# Altium PCB CAPSTONE_5.0.PcbDoc
Units mil, origin at the board's own origin, x right, y up, seen from the top; angles counter-clockwise.
Board outline 2900 x 2365 mil, 4 copper layers (Top Layer, GND, GND (Plane2), Bottom Layer), stack 27.756 mil thick; 47 components, 31 nets, 138 pads, 41 vias.
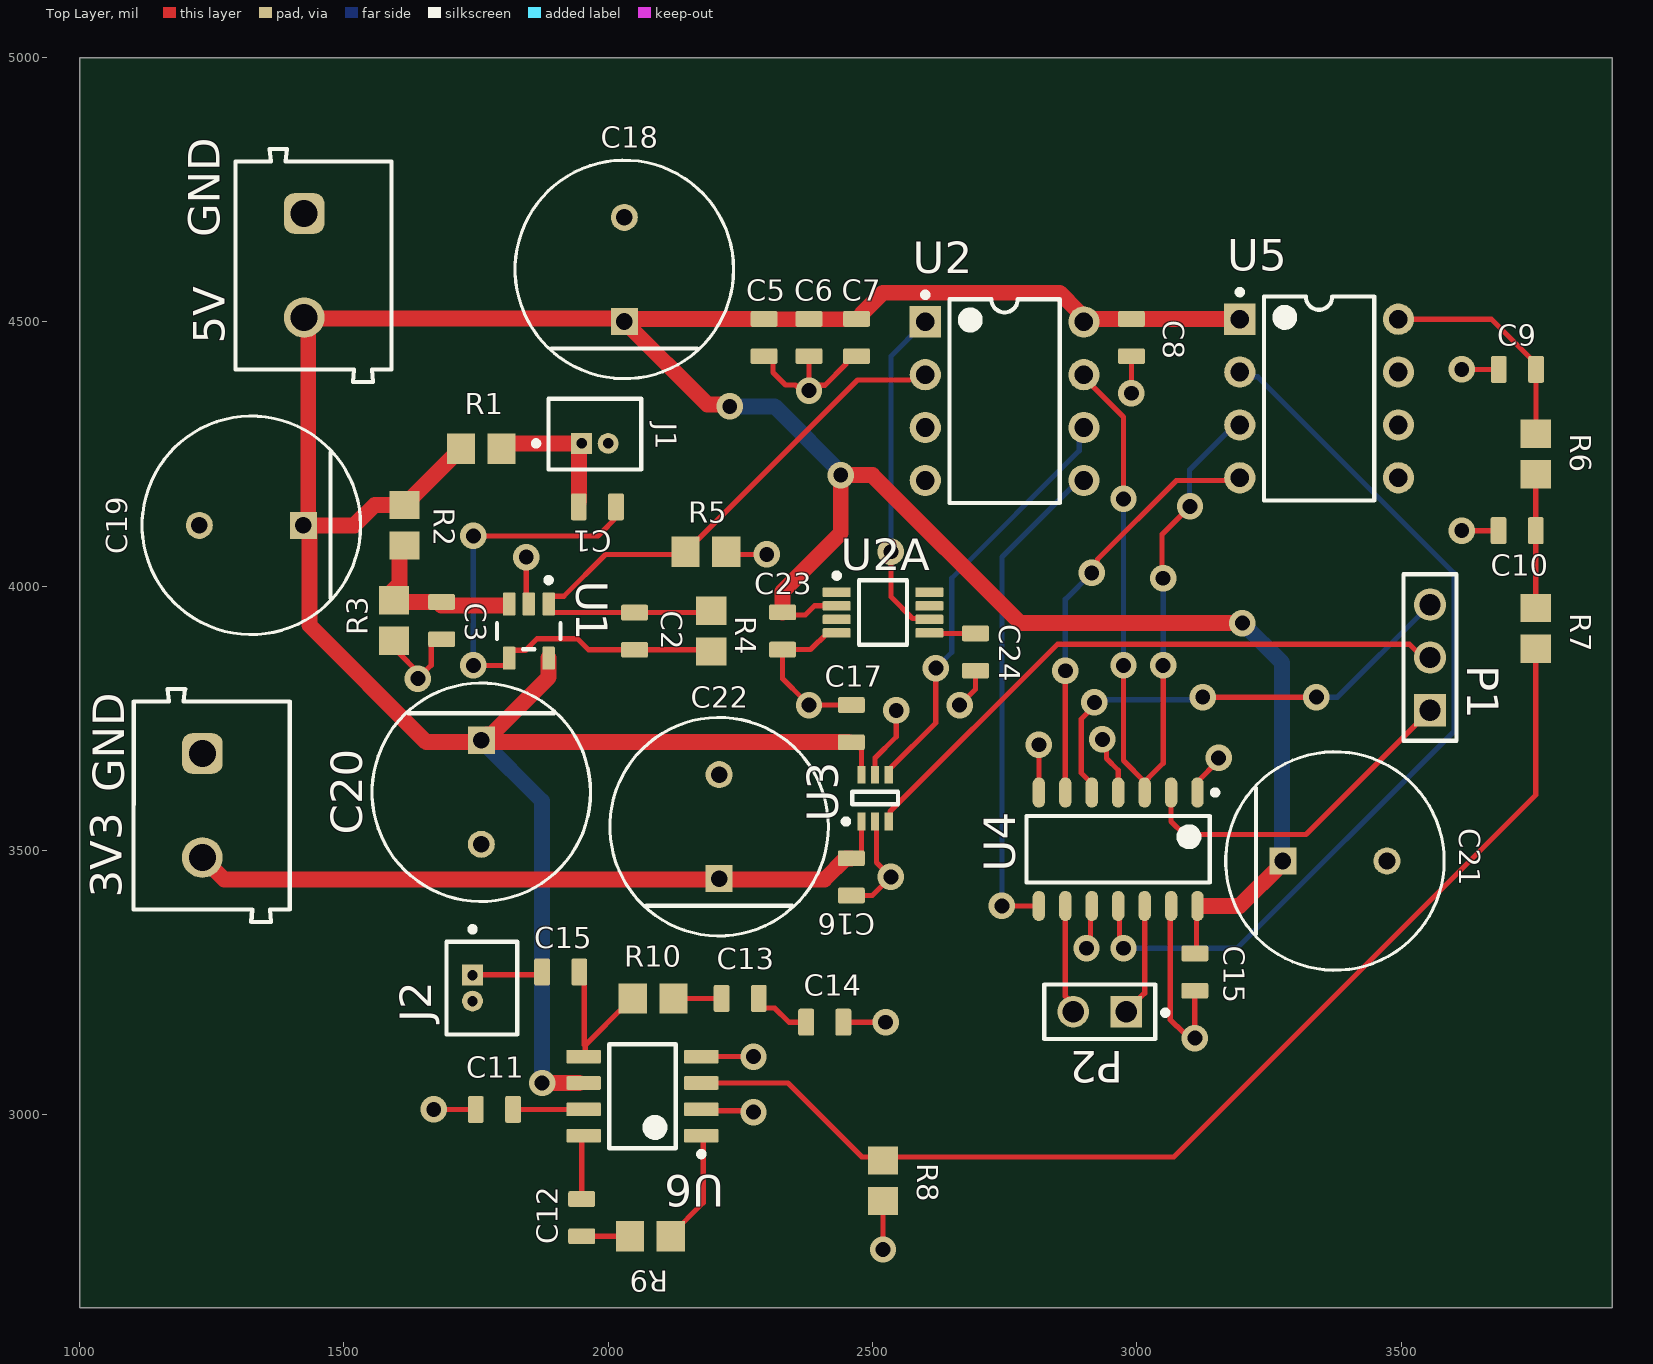
[diagram p0: Top Layer view]
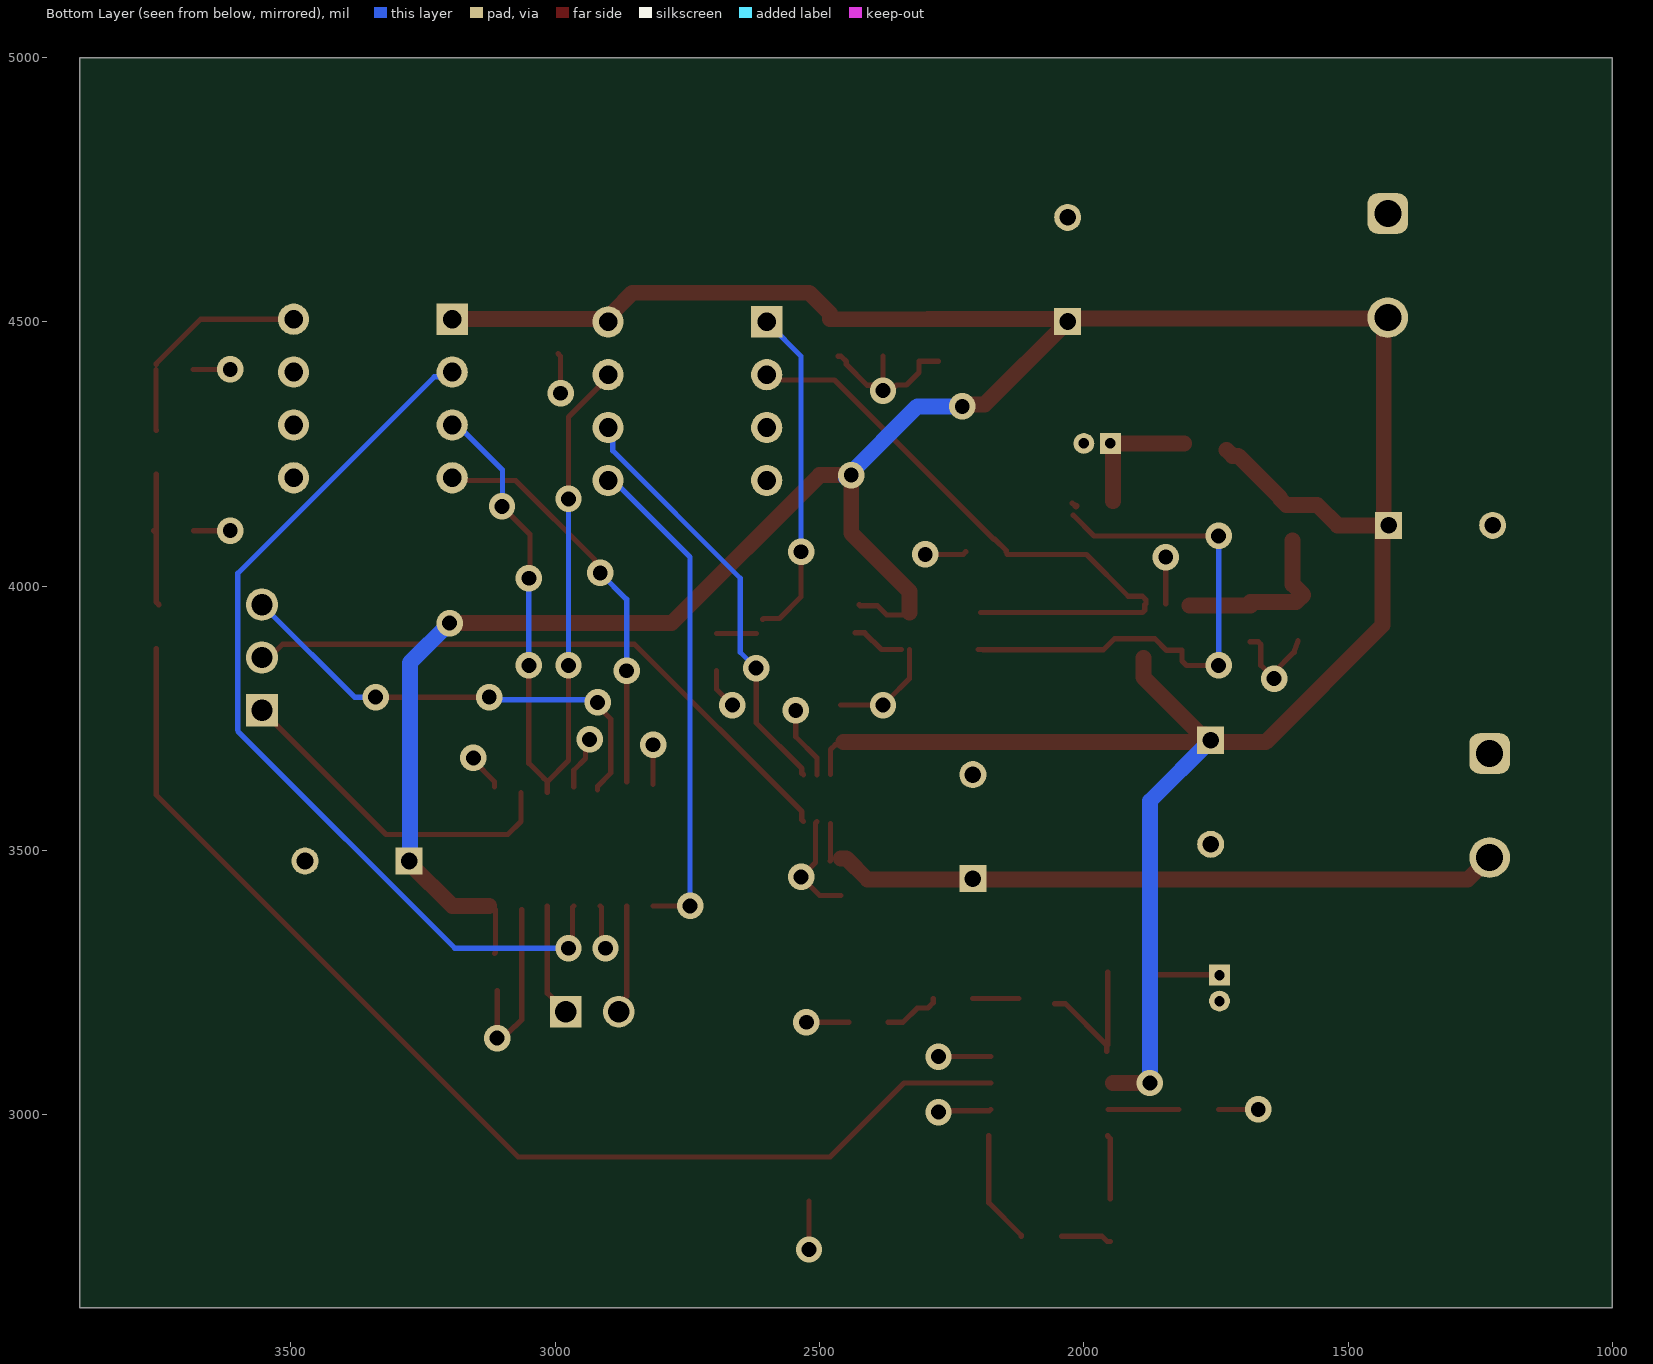
[diagram p1: Bottom Layer view, seen from below]
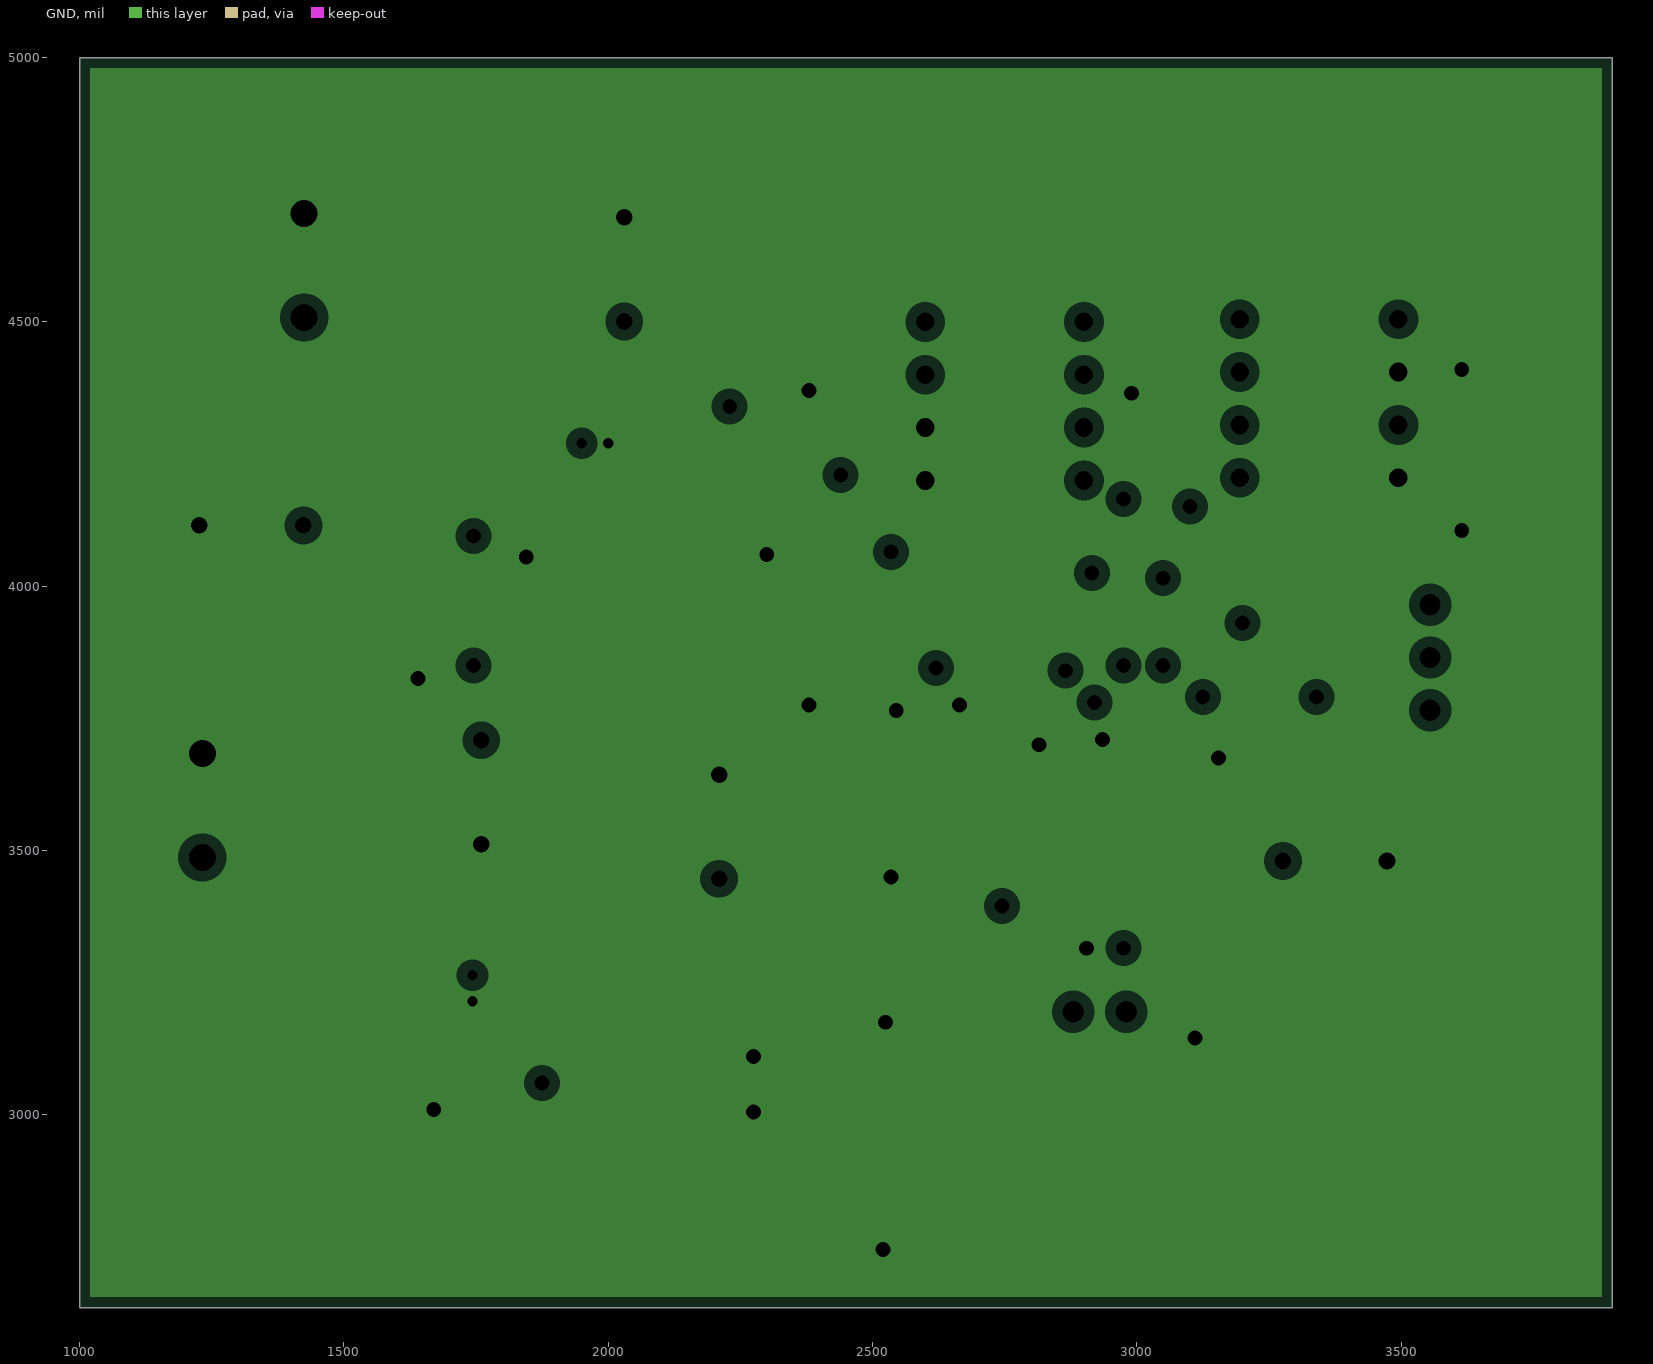
[diagram p2: GND, clearances drawn from the general rule]
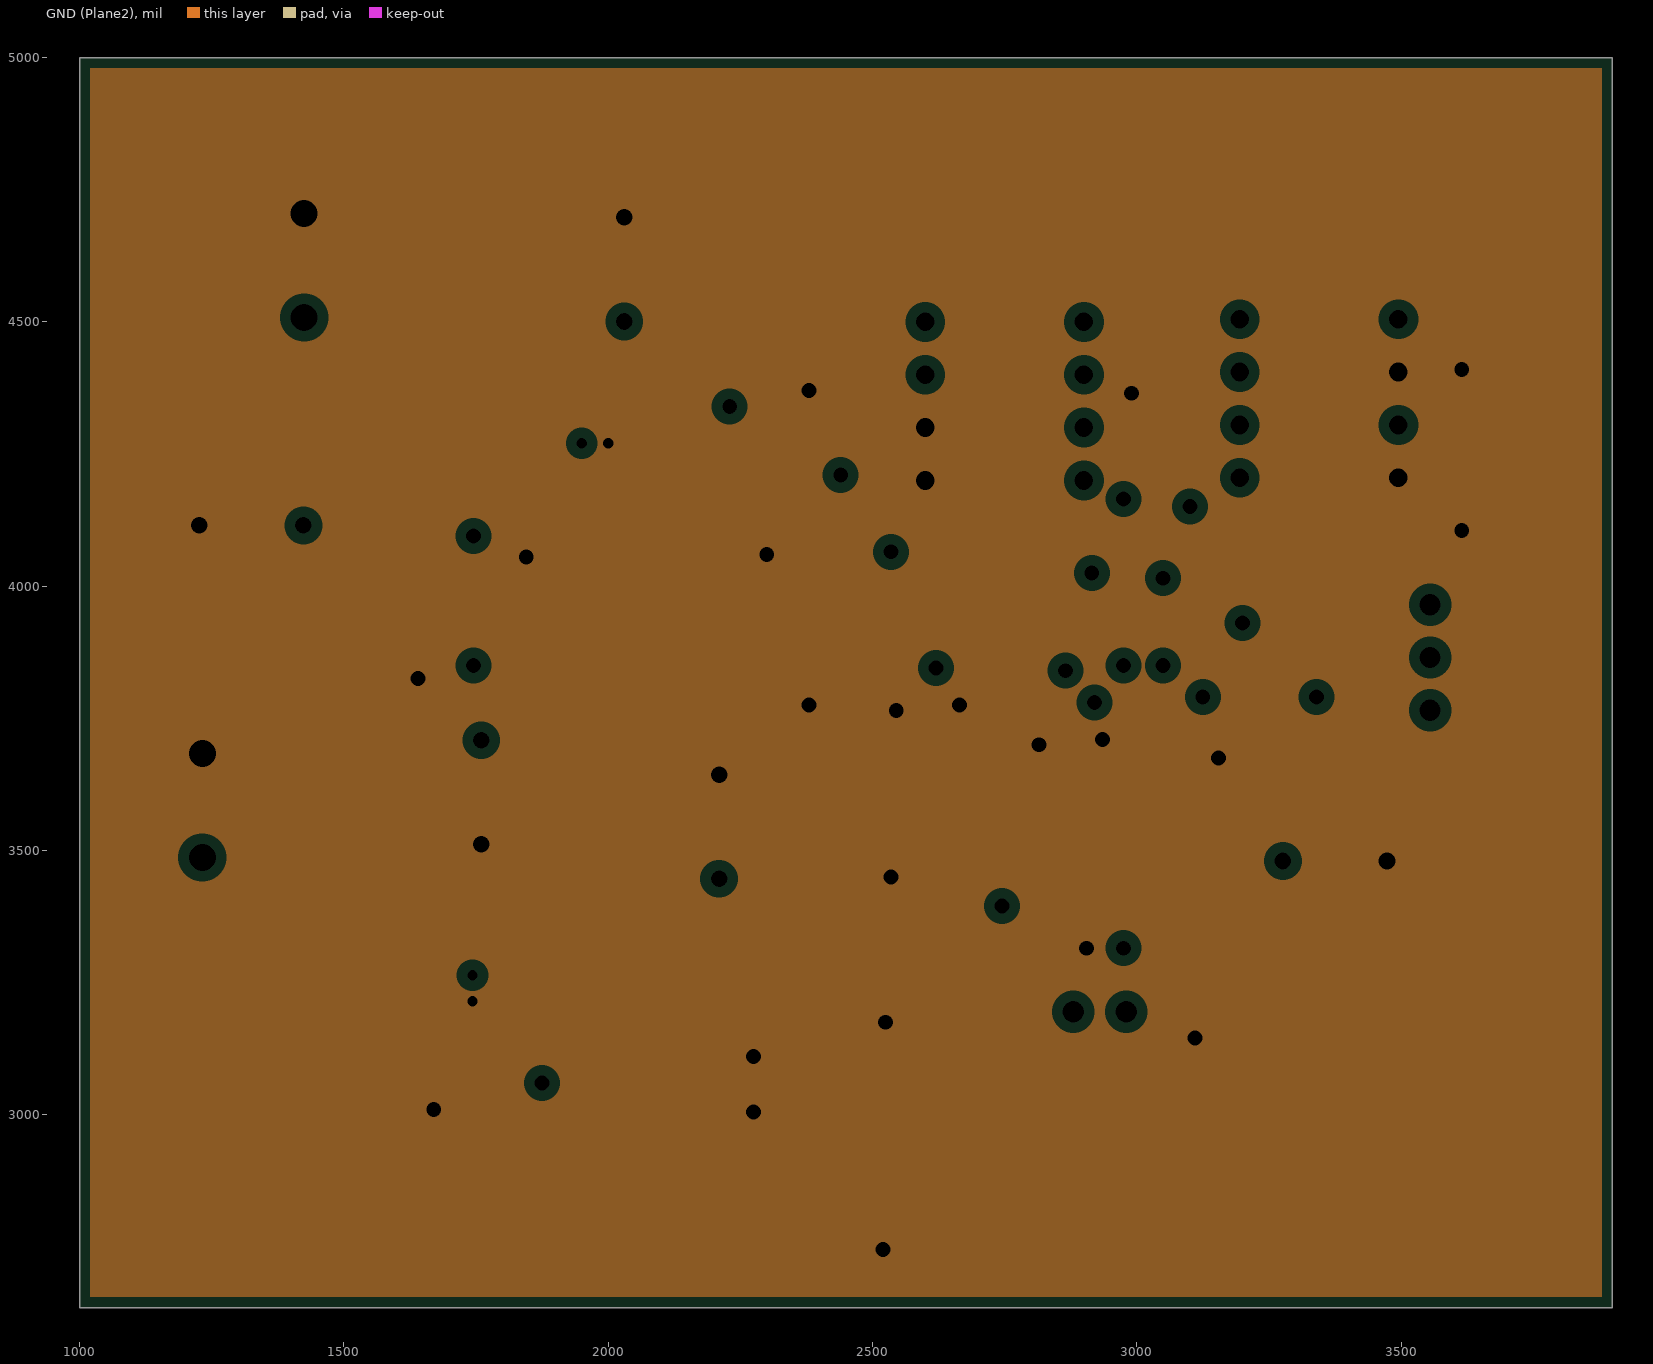
[diagram p3: GND (Plane2), clearances drawn from the general rule]
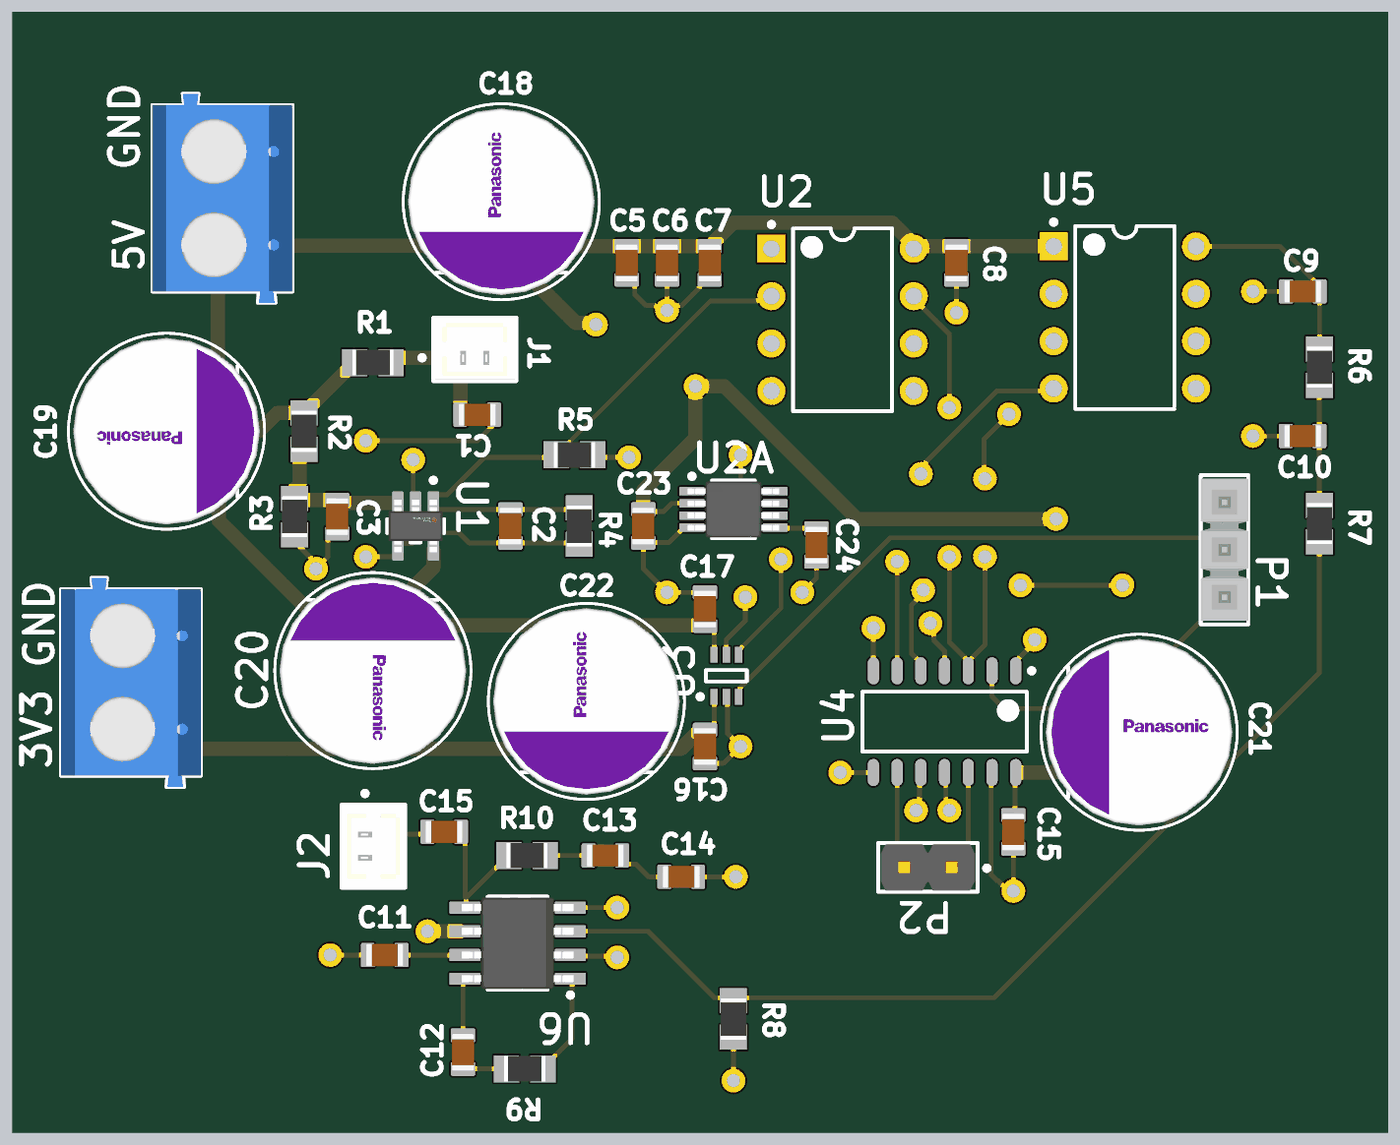
[diagram p4: 3D render of the assembled board from above, using the file's embedded part models]

## Layer stack, top to bottom
Top Solder: solder mask 0.4, Solder Resist, Dk 3.5
Top Layer: signal copper 1.4
Dielectric 2: prepreg 2.8, PP-006, Dk 4.1
Dielectric 3: prepreg 2, PP-001, Dk 3.9
GND: plane copper 1.378, net GND
Dielectric 1: dielectric 12.6, FR-4, Dk 4.8
GND (Plane2): plane copper 1.378, net GND
Dielectric 4: prepreg 2, PP-001, Dk 3.9
Dielectric 5: prepreg 2.8, PP-006, Dk 4.1
Bottom Layer: signal copper 1.4
Bottom Solder: solder mask 0.4, Solder Resist, Dk 3.5

## Board outline
1000,2635 3900,2635 3900,5000 1000,5000

## Design rules (kind name [scope] priority, off if disabled: settings)
Clearance Clearance_1 [All] p1: gap=10 ignorepadtopadclearanceinfootprint=FALSE
Clearance [All] p2: gap=10 ignorepadtopadclearanceinfootprint=FALSE
PlaneClearance [All] p1: clearance=20
PlaneConnect [All] p1: planeconnectstyle=Relief reliefexpansion=20 reliefentries=4 reliefconductorwidth=10 reliefairgap=10
PolygonConnect [All] p1: connectstyle=Relief reliefconductorwidth=10 reliefentries=4 polygonreliefangle="90 Angle" airgapwidth=10
RoutingVias [All] p1: holewidth=28 width=50 viastyle="Through Hole" minholewidth=28 minwidth=50 maxholewidth=28 maxwidth=50
SolderMaskExpansion [All] p1: expansion=4 istentingtop=FALSE
SupplyNets "Schematic Supply Nets_2" [InNet('GND')] p1: voltage=0.000
SupplyNets "Schematic Supply Nets_1" [InNet('+3.3')] p2: voltage=0.000
SupplyNets "Schematic Supply Nets" [InNet('+5')] p3: voltage=0.000
Width [All] p1: maxlimit=30 minlimit=10 preferedwidth=10 minimp=50.000000 maximp=50.000000 favimp=50.000000
28 further rules are at their usual default settings.

## Classes and differential pairs
component class CAPSTONE_5.0: C1 C2 C3 C6 C7 C8 C9 C10 C11 C12 C14 C15 J1 J2 P1 P2 R1 R2 R3 R4 R5 R6 R7 R8 R9 R10 U1 U2 U4 U5 U6

## Components (designator, comment, footprint, x,y, rotation, side; value= is the part's Value field where it differs from the comment)
3V3 "Comment" 691102710002 1250,3585 r270 top
5V "Comment" 691102710002 1442.72,4606.57 r270 top
C1 "Capacitor 4.7µF +/-40% 25V 0805" CAPC0805(2012)145_L 1980,4150 r0 top value=4.7µF
C2 "Capacitor 4.7µF +/-40% 25V 0805" CAPC0805(2012)145_L 2050,3915 r90 top value=15p
C3 "Capacitor 4.7µF +/-40% 25V 0805" CAPC0805(2012)145_L 1685,3935 r90 top value=3.3uF
C5 "Capacitor 4.7µF +/-40% 25V 0805" CAPC0805(2012)145_L 2295,4470 r270 top value=10uF
C6 "Capacitor 4.7µF +/-40% 25V 0805" CAPC0805(2012)145_L 2380,4470 r270 top value=10uF
C7 "Capacitor 4.7µF +/-40% 25V 0805" CAPC0805(2012)145_L 2470,4470 r270 top value=1uF
C8 "Capacitor 4.7µF +/-40% 25V 0805" CAPC0805(2012)145_L 2990,4470 r270 top value=0.1uF
C9 "Capacitor 4.7µF +/-40% 25V 0805" CAPC0805(2012)145_L 3720,4410 r180 top value=1uF
C10 "Capacitor 4.7µF +/-40% 25V 0805" CAPC0805(2012)145_L 3720,4105 r0 top value=1uF
C11 "Capacitor 4.7µF +/-40% 25V 0805" CAPC0805(2012)145_L 1785,3010 r0 top value=1uF
C12 "Capacitor 4.7µF +/-40% 25V 0805" CAPC0805(2012)145_L 1950,2805 r270 top value=1uF
C13 "Capacitor 4.7µF +/-40% 25V 0805" CAPC0805(2012)145_L 2250,3220 r0 top value=0.1uF
C14 "Capacitor 4.7µF +/-40% 25V 0805" CAPC0805(2012)145_L 2410,3175 r0 top value=0.1uF
C15 "Capacitor 4.7µF +/-40% 25V 0805" CAPC0805(2012)145_L 1910,3270 r180 top value=1uF
C15 "Capacitor 4.7µF +/-40% 25V 0805" CAPC0805(2012)145_L 3110,3269.57 r270 top value=0.1uF
C16 "Capacitor 4.7µF +/-40% 25V 0805" CAPC0805(2012)145_L 2460,3450 r90 top value=0.1uF (schematic designator C15)
C17 "Capacitor 4.7µF +/-40% 25V 0805" CAPC0805(2012)145_L 2460,3740 r90 top value=0.1uF (schematic designator C15)
C18 "Comment" FP-OS-CON-TH-F13-d_0_6-MFG 2030.63,4599.17 r90 top
C19 "Comment" FP-OS-CON-TH-F13-d_0_6-MFG 1325,4115 r180 top
C20 "Comment" FP-OS-CON-TH-F13-d_0_6-MFG 1760,3610 r270 top
C21 "Comment" FP-OS-CON-TH-F13-d_0_6-MFG 3375,3480 r0 top
C22 "Comment" FP-OS-CON-TH-F13-d_0_6-MFG 2210,3545 r90 top
C23 "Capacitor 4.7µF +/-40% 25V 0805" CAPC0805(2012)145_L 2330,3915 r270 top value=0.1uF (schematic designator C15)
C24 "Capacitor 4.7µF +/-40% 25V 0805" CAPC0805(2012)145_L 2695,3875 r270 top value=0.1uF (schematic designator C15)
J1 "53047-0210" FP-53047-0210-MFG#1 1974.89,4287.72 r180 top
J2 "53047-0210" FP-53047-0210-MFG#2 1761.13,3239.61 r90 top
P1 "TSW-103-07-G-S" SMTC-TSW-103-07-X-S 3555,3765 r90 top
P2 "MTLW-102-07-G-S-230" FP-MTLW-102-07-G-S-230-MFG 2930,3195 r180 top
R1 "Resistor 100k +/-1% 0805 125 mW" RESC2013X70X40ML20T20 1760,4260 r0 top value=100k
R2 "Resistor 100k +/-1% 0805 125 mW" RESC2013X70X40ML20T20 1615,4115 r270 top value=100k
R3 "Resistor 100k +/-1% 0805 125 mW" RESC2013X70X40ML20T20 1595,3935 r270 top value=100k
R4 "Resistor 100k +/-1% 0805 125 mW" RESC2013X70X40ML20T20 2195,3915 r270 top value=100k
R5 "Resistor 100k +/-1% 0805 125 mW" RESC2013X70X40ML20T20 2185,4065 r0 top value=10k
R6 "Resistor 4k7 +/-1% 0805 125 mW" RESC2013X70X40ML20T20 3755,4250 r270 top value=4.7k
R7 "Resistor 100k +/-1% 0805 125 mW" RESC2013X70X40ML20T20 3755,3920 r270 top value=5k
R8 "Resistor 100k +/-1% 0805 125 mW" RESC2013X70X40ML20T20 2520,2875 r270 top value=5k
R9 "Resistor 100k +/-1% 0805 125 mW" RESC2013X70X40ML20T20 2080,2770 r0 top value=1.2k
R10 "Resistor 100k +/-1% 0805 125 mW" RESC2013X70X40ML20T20 2085,3220 r180 top value=10
U1 "OPA172IDBVT" FP-DBV0005A-MFG 1850,3915 r270 top
U2 "MCP3201-BI/P" PDIP300-P8 2750,4350 r0 top
U2A "Comment" DGK0008A_N 2520,3950 r0 top
U3 "SN74LVC1T45DBVRE4" SOT65P210X110-6N 2505,3599.08 r90 top
U4 "74ALVC125D,118" SOIC127P600X175-14N 2965,3502.28 r270 top
U5 "MCP4822-E/P" PDIP300-P8 3345,4355 r0 top
U6 "LM386M-1" D0008A_M 2065,3035 r180 top

## Footprints (in the part's own frame and the unit in brackets; to place one, negate y for a bottom-side part, rotate by r counter-clockwise, add the part's x,y. Pads: shape width x height; smd on the part's side, far side on the other; paste and mask are expansions set on the pad)
691102710002 [mm] "5,00mm - modular - blue - Horizontal entry with pressure clamp - 9,9 mm height - 02p"
  rrect50% 1.95x1.95 hole 1.3: 1(-2.5,-0.45)
  round 1.95 hole 1.3: 2(2.5,-0.45)
  silkscreen extent -5.6,-3.75 5.6,3.75, body extent -5.6,-3.75 5.6,3.75, height 9.96
CAPC0805(2012)145_L [mm] "Chip Capacitor, Body 2.0x1.2mm, Height 1.45mm, IPC High Density"
  rrect25% 0.76x1.3 smd: 1(-0.9,0) 2(0.89,0)
  body extent -1,-0.6 1,0.6, height 1.45
D0008A_M [mm] "SOIC, 8-Leads, Body 5x4mm, Pitch 1.27mm, IPC Low Density"
  rrect15% 1.65x0.65 smd: 1(-2.825,1.905) 2(-2.825,0.635) 3(-2.825,-0.635) 4(-2.825,-1.905) 5(2.825,-1.905) 6(2.825,-0.635) 7(2.825,0.635) 8(2.825,1.905)
  silkscreen extent -2.95,-2.5 1.6,2.9, body extent -3,-2.45 3,2.45, height 1.63
DGK0008A_N [mm] "TSOP, 8-Leads, Body 3.1x3.1mm, Pitch 0.65mm, IPC Medium Density"
  rrect22% 1.35x0.45 smd: 1(-2.225,0.975) 2(-2.225,0.325) 3(-2.225,-0.325) 4(-2.225,-0.975) 5(2.225,-0.975) 6(2.225,-0.325) 7(2.225,0.325) 8(2.225,0.975)
  silkscreen extent -2.35,-1.55 1.15,1.9, body extent -2.45,-1.5 2.45,1.5, height 0.94
FP-53047-0210-MFG#1 [mm]
  rect 1x1 hole 0.5 paste-2539.97 mask+0: 1(0.64,0.45)
  round 1 hole 0.5 paste-2539.97 mask+0: 2(-0.638,0.45)
  silkscreen extent -2.22,-1.7 2.95,1.7, body extent -2.32,-1.8 2.32,1.8, height 0.25
FP-53047-0210-MFG#2 [mm]
  rect 1x1 hole 0.5 paste-2539.97 mask+0: 1(0.625,0.45)
  round 1 hole 0.5 paste-2539.97 mask+0: 2(-0.625,0.45)
  silkscreen extent -2.22,-1.7 2.95,1.7, body extent -2.32,-1.8 2.32,1.8, height 0.25
FP-DBV0005A-MFG [mm]
  rrect17% 1.1x0.6 smd paste+0 mask+0: 1(-1.3,0.95) 2(-1.3,0) 3(-1.3,-0.95) 4(1.3,-0.95) 5(1.3,0.95)
  silkscreen extent -2.57,-1.53 0.87,1.53, body extent -1.95,-1.78 1.95,1.78, height 0.25
FP-MTLW-102-07-G-S-230-MFG [mm]
  rect 1.52x1.52 hole 1.02 paste-2539.97 mask+0: 1(-1.27,0)
  round 1.52 hole 1.02 paste-2539.97 mask+0: 2(1.27,0)
  silkscreen extent -3.27,-1.31 2.67,1.31, body extent -2.77,-1.41 2.77,1.41, height 0.25
FP-OS-CON-TH-F13-d_0_6-MFG [mm]
  rect 1.3x1.3 hole 0.8 paste-2539.97 mask+0: 1(-2.5,0)
  round 1.3 hole 0.8 paste-2539.97 mask+0: 2(2.5,0)
  silkscreen extent -5.25,-5.25 5.25,5.25, body extent -5.35,-5.35 5.35,5.35, height 0.25
PDIP300-P8 [mm] "8-Pin Plastic Dual In-Line Package (PDIP)"
  rect 1.5x1.5 hole 0.9: 1(-3.81,3.81)
  round 1.5 hole 0.9: 2(-3.81,1.27) 3(-3.81,-1.27) 4(-3.81,-3.81) 5(3.81,-3.81) 6(3.81,-1.27) 7(3.81,1.27) 8(3.81,3.81)
  silkscreen extent -3.93,-4.9 2.65,5.23, body extent -3.55,-4.9 3.55,4.9, height 4.32
RESC2013X70X40ML20T20 [mm] "Chip Resistor, 2-Leads, Body 2.2x1.35mm, IPC Low Density"
  rect 1.35x1.45 smd: 1(-0.975,0) 2(0.975,0)
  body extent -1.1,-0.67 1.1,0.67, height 0.7
SMTC-TSW-103-07-X-S [mm] ".025 SQ Post Terminal Strip Assembly, 1x3 Pins, Vertical, 2.54mm Pitch, Male"
  rect 1.55x1.55 hole 1.02: 1(0,0)
  round 1.55 hole 1.02: 2(2.54,0) 3(5.08,0)
  silkscreen extent -1.46,-1.27 6.54,1.27, body extent -1.27,-1.27 6.35,1.27, height 8.38
SOIC127P600X175-14N [mm] "SOIC, 14-Leads, Body 8.65x3.90mm, Pitch 1.27mm, IPC Medium Density"
  oval 1.45x0.6 smd: 1(-2.725,3.81) 2(-2.725,2.54) 3(-2.725,1.27) 4(-2.725,0) 5(-2.725,-1.27) 6(-2.725,-2.54) 7(-2.725,-3.81) 8(2.725,-3.81) 9(2.725,-2.54) 10(2.725,-1.27) 11(2.725,0) 12(2.725,1.27) 13(2.725,2.54) 14(2.725,3.81)
  silkscreen extent -2.85,-4.4 1.6,4.79, body extent -2,-4.4 2,4.4, height 1.75
SOT65P210X110-6N [mm] "SOT23, 6-Leads, Body 2.00x2.10mm, Pitch 0.65mm, IPC Medium Density"
  rect 0.85x0.4 smd: 1(-1.125,0.65) 2(-1.125,0) 3(-1.125,-0.65) 4(1.125,-0.65) 5(1.125,0) 6(1.125,0.65)
  silkscreen extent -1.25,-1.1 0.3,1.52, body extent -0.7,-1.07 0.7,1.08, height 1.1

## Part data
C1 C2 C3 C5 C6 C7 C8 C9 C10 C11 C12 C13 C14 C15 C15 C16 C17 C23 C24: library part CMP-001-00080-4, "Chip Capacitor, 4.7µF +/-40%, 25V, 0805, Thickness 1.45 mm", Case/Package=0805, Max Operating Temperature=85°C, Min Operating Temperature=-55°C, Tolerance=20%, Voltage Rating=25V, Mounting Technology=SMT, Pins=2
J1 J2: library part CMP-2000-05628-3, "CONN HEADER VERT 2POS 1.25MM", Ambient Temperature Range High=+85°C, Ambient Temperature Range Low=-40°C, Current Rating=1A, Manufacturer=Molex, Package=0, Temperature="-40°C to +85°C", Voltage Rating=125V, Automotive=No, Category=Conn, ComponentLink2Description=Datasheet, ComponentLink2URL=http://www.molex.com/webdocs/datasheets/pdf/en-us/0530470210_PCB_HEADERS.pdf, Conn Gender=Male, Conn Orientation=Vertical, Contact Material=Tin, Device Class L1=Connectors, Device Class L2="Headers and Wire Housings", Device Class L3=unset, Digikey Description="CONN HEADER VERT 2POS 1.25MM", Footprint Url=https://www.molex.com/pdm_docs/sd/530470210_sd.pdf, Height=4.4mm, Lead Free=Yes, Manufacturer Part Number=53047-0210, Mouser Description="1.25mm Pitch PicoBlade™ Wire-to-Board Header, Vertical, with Friction Lock, 2 Circuits", Number Of Contacts=2, Number of Rows=1, Octopart=https://octopart.com/53047-0210-molex-276772, Pitch=1.25mm, RoHS=TRUE, Temperature Range High=+85°C, Temperature Range Low=-40°C
P1: library part CMP-1024-00333-1, "0.025\" SQ Post Header, Through-hole, Vertical, -55 to 125 degC, 2.54 mm Pitch, 3-Pin, Male, RoHS", Manufacturer=Samtec, Temperature Range="-55 to 125 degC", ComponentLink1Description="Manufacturer URL", ComponentLink1URL=http://www.samtec.com, ComponentLink2Description=Datasheet, ComponentLink2URL=http://www.samtec.com/documents/webfiles/pdf/TSW_TH.PDF, ComponentLink3Description="Package Specification", ComponentLink3URL=http://www.samtec.com/documents/webfiles/cpdf/TSW-XXX-XX-XXX-X-XX-XXX-MKT.pdf, DatasheetVersion=F-214, Mounting Technology=Through-hole, Orientation=Vertical, PackageDescription=".025[0.64] SQ. Post Terminal Strip Assembly", PackageReference=TSW-103-07-X-S, PackageVersion="DM, 8/1988", PartNumber=TSW-103-07-G-S, Pitch="2.54 mm", RoHS=True
P2: library part CMP-02766-001053-1, "CONN HEADER VERT 2POS 2.54MM", Housing Color=Black, Max Current Rating=3A, Max Operating Temperature=125°C, Min Operating Temperature=-55°C, Contact Material=Bronze, Contact Plating=Gold, Depth=2.48mm, Gender=Male, Housing Material=Polymer, Length=5.08mm, Number Of Contacts=2, Number of Rows=1, Orientation=Straight, Packaging=Bulk, Pitch=2.54mm, Radiation Hardening=No, Termination=Solder
R1 R2 R3 R4 R5 R7 R8 R9 R10: library part CMP-009-00024-5, "Chip Resistor, 100 KOhm, +/- 1%, 0.125 W, -55 to 155 degC, 0805 (2012 Metric)", Case/Package=0805, Max Operating Temperature=155°C, Min Operating Temperature=-55°C, Power=125mW, Tolerance=1%, Voltage Rating=150V, Mounting Technology=SM, Pins=2, RoHS Compliant=True
R6: library part CMP-009-00032-5, "Chip Resistor, 4.7 KOhm, +/- 1%, 0.125 W, -55 to 155 degC, 0805 (2012 Metric)", Case/Package=0805, Max Operating Temperature=155°C, Min Operating Temperature=-55°C, Power=125mW, Tolerance=1%, Voltage Rating=150V, Mounting Technology=SM, Pins=2, RoHS Compliant=True
U1: library part CMP-04893-000008-1, "IC OPAMP GP 1 CIRCUIT SOT23-5", Case/Package=SOT-23-5, Input Bias Current=8pA, Input Offset Voltage (Vos)=200uV, Max Dual Supply Voltage=18V, Max Operating Temperature=125°C, Max Supply Voltage=36V, Min Dual Supply Voltage=2.25V, Min Operating Temperature=-40°C, Min Supply Voltage=4.5V, Operating Supply Current=1.6mA, Output Current per Channel=75mA, Voltage Gain=130dB, Bandwidth=10MHz, Common Mode Rejection Ratio=90dB, Gain Bandwidth Product=10MHz, Lead Free="Lead Free", Mount="Surface Mount", Number of Amplifiers=1, Number of Channels=1, Number of Circuits=1, Number of Pins=5, Packaging="Cut Tape", REACH SVHC="No SVHC", RoHS Compliant=Yes, Slew Rate=10V/µs
U2: library part CMP-0188-00242-2, "2.7V 12-Bit A/D Converter with SPI Serial Interface, 8-Pin PDIP, B Performance Grade, Industrial Temperature", Code_JEDEC=MS-001, ComponentLink1Description="Manufacturer URL", ComponentLink1URL=http://www.microchip.com/, ComponentLink2Description=Datasheet, ComponentLink2URL=http://ww1.microchip.com/downloads/en/DeviceDoc/21290F.pdf, ComponentLink3Description="Package Specification", ComponentLink3URL=http://www.microchip.com/stellent/groups/techpub_sg/documents/packagingspec/en012702.pdf, DatasheetVersion="revF, Aug-2011", PackageDescription="8-Lead Plastic Dual In-Line (P) - 300 mil Body [PDIP]", PackageReference=PDIP300-P8, PackageVersion="revBB, Aug-2009", RevisionNote="URLs added. DatasheetVersion updated."
U3: library part CMP-015-00011-1, "Single-Bit Dual-Supply Bus Transceiver with Configurable Voltage-Level Shifting and 3-State Outputs 6-SOT-23 -40 to 85", Case/Package=SOT-23, Max Operating Temperature=85°C, Max Supply Voltage=5.5V, Min Operating Temperature=-40°C, Min Supply Voltage=1.65V, Mounting Technology="Surface Mount", Pins=6
U4: library part CMP-015-00010-1, "Buffer / Line Driver, Non Inverting, 74ALVC125, 4 Element, 1.65 V to 3.6 V, 14 Pins, SOIC", Case/Package=SO, Max Operating Temperature=85°C, Max Supply Voltage=3.6V, Min Operating Temperature=-40°C, Min Supply Voltage=1.65V, Mounting Technology="Surface Mount", Pins=14
U5: library part CMP-0188-00222-2, "12-Bit DACs with Internal VREF and SPI Interface, 8-Pin PDIP, Extended Temperature", Code_JEDEC=MS-001, ComponentLink1Description="Manufacturer URL", ComponentLink1URL=http://www.microchip.com/, ComponentLink2Description=Datasheet, ComponentLink2URL=http://ww1.microchip.com/downloads/en/DeviceDoc/22249A.pdf, ComponentLink3Description="Package Specification", ComponentLink3URL=http://www.microchip.com/stellent/groups/techpub_sg/documents/packagingspec/en012702.pdf, DatasheetVersion="revA, Apr-2010", PackageDescription="8-Lead Plastic Dual In-Line (P) - 300 mil Body [PDIP]", PackageReference=PDIP300-P8, PackageVersion="revBB, Aug-2009", RevisionNote="URLs added. DatasheetVersion updated. Sch updated."
U6: library part CMP-0057-00421-4, "Low Voltage Audio Power Amplifier, 8-pin Narrow SOIC", Manufacturer="Texas Instruments", PackageTopMarking=NSZXTT*LM386*M-1, PowerWise=N, Code_IPC=SOIC127P600-8, Code_JEDEC=MS-012-AA, ComponentLink1Description="Datasheet URL", ComponentLink1URL=http://www.ti.com/general/docs/lit/getliterature.tsp?genericPartNumber=LM386&fileType=pdf, CompType="Audio IC", PackageDescription="SOIC Narrow, 4.9 x 3.9 x 1.45mm, 8 Lead, 1.27mm Pitch", PackageReference=D0008A, PinCount=8, RoHS=N

## Via types
v1: diameter 50, hole 28, Top Layer to Bottom Layer, 41 vias

## Nets (pads, with @x,y where several pads share a name; then routed paths per layer and width w, separated by ;. In a path a pad name is that pad's centre, name@x,y a point inside that pad or via, vN(x,y) a via of type N, cw(c..) or ccw(c..) an arc to the next point about the centre after c; other vN are vias at no path point)
+3.3: 3V3.2 C16.2 C22.1 U3.1 | length 1332.5
  Top Layer w10: U3.1@2479.41,3550.71 2479.41,3480.59 C16.2@2480,3480
  Top Layer w30: 3V3.2 1273.86,3445 2210,3445 2409.41,3445 2449.45,3485.04 C16.2
+5: 5V.2 C5.1 C6.1 C7.1 C8.1 C15.1@3110,3305 C17.1 C18.1 C19.1 C20.1 C21.1 C23.1 R1.1 R2.1 U1.5 U2.8 U2A.2 U3.6 U4.14 U5.1 U6.6 | length 7447
  Top Layer w10: C23.1@2330,3945.43 2372.89,3945.43 2390.26,3962.8 2423.27,3962.8 U2A.2@2425,3964.53 ; C17.1@2460,3700 2470.2,3700 2479.41,3690.79 U3.6@2479.41,3644.29 ; U4.14@3113.22,3387.72 3113.22,3306.78 C15.1@3115,3305
  Top Layer w30: C19.1 1432.75,4124.32 1432.75,4500.4 5V.2 ; 5V.2@1432.99,4497.64 1441.96,4506.6 C18.1@2030.63,4506.6 ; R1.1@1730.04,4257.89 1718.61,4246.46 1708.07,4246.46 1628.54,4166.93 1628.54,4164.96 1616.97,4153.39 R2.1 1558.39,4153.39 1520,4115 1435,4115 1435,3926.14 1656.14,3705 C17.1@2455,3705 ; C20.1 1770.59,3719.02 1778.82,3719.02 1887.4,3827.6 U1.5 ; v1(1875,3060) U6.6@1945,3060 ; v1(2230,4340) 2226.17,4343.83 2187.55,4343.83 C18.1 2035.32,4505.43 C5.1 ; C5.1@2295,4505 2380,4505 C7.1@2470,4505 ; C23.1 2330,3990 2440,4100 v1@2440,4205 ; v1(2440,4210) 2500,4210 2780,3930 v1(3200,3930) ; C7.1 2480.55,4505.43 2480.59,4505.47 2480.59,4516.02 2519.57,4555 2854.06,4555 U2.8@2889.44,4519.62 ; U2.8@2924.41,4505.43 U5.1@3194.57,4505.43 ; U4.14@3125,3395 3195,3395 C21.1@3275,3475
  Bottom Layer w30: C20.1 1875,3593.43 v1(1875,3060) ; v1(2230,4340) 2315,4340 v1@2450,4205 ; v1(3200,3930) 3275,3855 C21.1@3275,3480
GND: 3V3.1 5V.1 C3.1 C5.2 C6.2 C7.2 C8.2 C9.2 C10.1 C11.1 C14.2 C15.2@3110,3234.53 C16.1 C17.2 C18.2 C19.2 C20.2 C21.2 C22.2 C23.2 C24.2 J1.2 J2.2 R3.2 R5.2 R8.2 U1.2 U2.3 U2.4 U2A.4 U3.2 U3.5 U4.1 U4.4 U4.7 U4.10 U4.13 U5.5 U5.7 U6.2 U6.4 | length 2752.5
  Top Layer w10: R3.2 1602.09,3875.04 1640,3837.13 v1(1640,3825) ; v1@1640,3835 1649.73,3835 1665.13,3850.4 1665.13,3889.61 1670.09,3894.57 C3.1@1685,3894.57 ; v1(1670,3010) C11.1@1745,3010 ; U1.2@1845,3966.18 v1(1845,4055) ; U6.2 2178.72,3007.5 2272.5,3007.5 v1@2280,3015 ; U6.4 v1(2275,3110) ; R5.2 2228.39,4060 v1(2300,4060) ; C5.2@2275,4425.59 2311.26,4425.59 2311.85,4425 2311.85,4404.33 2335.59,4380.59 2354.14,4380.59 2357.08,4377.65 2371.47,4377.65 2374.41,4380.59 v1@2380,4375 ; C23.2 2330,3825 2370,3785 v1@2380,3785 ; C23.2@2345.04,3879.96 2383.03,3879.96 2414.69,3911.61 U2A.4 ; v1(2380,3775) C17.2 ; v1(2380,4370) v1@2380,4375 ; C6.2 2380,4386.62 v1@2385.81,4380.81 ; C14.2 2520,3175 v1@2525,3170 ; C16.1 2499.57,3414.57 v1(2535,3450) 2507.72,3477.28 2507.72,3552.08 U3.2 ; C7.2@2465,4435 2459.41,4435 2449.41,4425 2449.41,4419.41 2409.87,4379.87 2400.69,4379.87 2398.48,4377.65 2388.97,4377.65 v1@2385.81,4380.81 ; U3.5 2505,3675.11 2545,3715.11 v1(2545,3765) ; v1(2520,2745) R8.2 ; v1@2670,3785 2675,3785 2695,3805 C24.2 ; U4.7@2815,3625 v1(2815,3700) ; v1(2905,3315) 2912.39,3322.39 2912.39,3392.39 U4.10 ; v1(2935,3710) 2942.65,3702.35 2942.65,3674.05 2965,3651.7 U4.4@2965,3620 ; v1(2990,4365) C8.2 ; C8.2 C8.2@2995,4440 ; U4.13@3063.22,3387.72 3063.22,3179.79 3076.21,3166.8 3077.38,3166.8 3099.18,3145 v1(3110,3145) C15.2@3110,3234.53 ; U4.1@3115,3620 3115,3629.99 3155,3669.99 v1(3155,3675) ; v1@3610,4105 C10.1 ; v1@3615,4405 3620,4410 C9.2 ; v1@2380,4375 v1@2385.81,4380.81
  other v1: 2275,3005 2525,3175 2665,3775 3615,4105 3615,4410
NetC1_1: C1.1 J1.1 R1.2 | length 253.3
  Top Layer w30: R1.2@1810,4270 J1.1 ; C1.1@1944.61,4160.59 1944.61,4259.91 J1.1@1954.7,4270
NetC1_2: C1.2 C2.1 R4.2 U1.4 | length 1050.1
  Top Layer w10: v1(1745,3850) 1805.79,3850 1814.41,3858.62 1814.41,3878.46 1843.55,3878.46 1865.55,3900.47 1942.01,3900.47 1962.91,3879.57 C2.1@2049.57,3879.57 ; v1(1745,4095) 1980.67,4095 C1.2@2020.04,4134.37 ; C2.1 R4.2@2190.43,3879.57 ; R4.2@2195,3880 R4.2@2200.35,3880 ; C1.2@2013.06,4151.98 2021.77,4156.73 C1.2 C1.2@2013.06,4151.98
  Bottom Layer w10: v1(1745,3850) v1(1745,4095)
NetC2_2: C2.2 R4.1 R5.1 U1.1 U2.2 | length 1187.8
  Top Layer w10: U1.1@1882.4,3966.18 1882.4,3974.02 1889.21,3980.83 1916.02,3980.83 1995.2,4060 R5.1@2145,4060 ; U1.1@1885,3965 1885,3954.25 1889.21,3950.04 C2.2 C2.2@2055.04,3950.04 ; C2.2@2055,3950 C2.2@2055.04,3950.04 ; R5.1 2146.61,4066.97 2168.19,4088.54 2170.16,4088.54 2471.61,4390 2570,4390 ; R4.1@2195,3950 2085.04,3950 2085,3950.04 C2.2@2055.04,3950.04
NetC3_2: C3.2 R2.2 R3.1 U1.3 | length 332
  Top Layer w30: R2.2@1605,4086.58 1605,4003.39 1585,3983.39 ccw(c1609.56,4000.62) 1589.55,3978.26 R3.1 1598.35,3970.04 C3.2 ; C3.2@1685,3963.39 1800,3963.39
NetC4_2: 
NetC9_1: C9.1 R6.1 U5.8 | length 411
  Top Layer w10: U5.8 3671.06,4505 3755,4421.06 C9.1@3755,4420 ; R6.1@3755,4295 3755.43,4295.43 C9.1
NetC10_2: C10.2 R6.2 R7.1 | length 255.7
  Top Layer w10: R7.1@3750,3965 3755.04,3970.04 3755.04,4100.04 3760,4105 C10.2 ; R6.2 R6.2 C10.2
NetC11_2: C11.2 U6.7 | length 133.8
  Top Layer w10: C11.2 U6.7
NetC12_1: C12.1 U6.8 | length 121.6
  Top Layer w10: C12.1 1950,2955 U6.8@1955,2960
NetC12_2: C12.2 R9.1 | length 95.8
  Top Layer w10: C12.2@1950,2760 1955.67,2760 1965.67,2770 R9.1
NetC13_1: C13.1 R10.1 | length 86.6
  Top Layer w10: R10.1 C13.1@2210,3220
NetC13_2: C13.2 C14.1 | length 108.3
  Top Layer w10: C13.2 2285.04,3211.97 2295,3202.01 2315,3202.01 2342.01,3175 C14.1@2370,3175
NetC15_1: C15.1@1945.43,3270 R10.2 U6.5 | length 280.4
  Top Layer w10: 1954.57,3131.94 C15.1@1954.57,3270 ; U6.5@1956.94,3120 1956.94,3131.94 2035,3210 R10.2@2055,3210
NetC15_2: C15.2@1874.96,3270 J2.1 | length 134.1
  Top Layer w10: J2.1@1745,3260 J2.1@1755,3270 ; J2.1@1755,3265 C15.2@1874.96,3265
NetC24-1: C24.1 U2A.5 | length 75
  Top Layer w10: U2A.5@2620,3910.43 C24.1
NetP1_1: P1.1 U4.2 | length 652.3
  Top Layer w10: U4.2 3065,3555 3090,3530 3320,3530 P1.1
NetP1_2: P1.2 U3.3 | length 1182.9
  Top Layer w10: U3.3 2533.46,3557.67 2533.46,3573.46 2850,3890 3516.19,3890 3541.19,3865 P1.2
NetP1_3: P1.3 U4.5 | length 876.1
  Top Layer w10: U4.5@2920,3615 2920,3621.3 2895,3646.3 2895,3748.43 2920,3773.43 v1(2920,3780) ; v1(3125,3790) v1@3335,3790
  Bottom Layer w10: v1(2920,3780) 2925,3785 v1@3125,3785 ; v1(3340,3790) 3380,3790 P1.3@3545,3955
NetP2_1: P2.1 U4.12 | length 212.4
  Top Layer w10: P2.1@2985,3195 2985,3200 3015,3230 U4.12
NetP2_2: P2.2 U4.9 | length 199.2
  Top Layer w10: U4.9 2865,3223.49 2883.49,3205 P2.2@2885,3205
NetR7_2: R7.2 R8.1 U6.3 | length 2197.1
  Top Layer w10: U6.3 2340,3060 2480,2920 2930,2920 3070,2920 3755,3605 R7.2
NetR9_2: R9.2 U6.1 | length 215.5
  Top Layer w10: R9.2 2118.39,2771.97 2180,2833.58 U6.1@2180,2960
NetU2_5: U2.5 U4.8 | length 920.1
  Top Layer w10: v1@2760,3395 U4.8
  Bottom Layer w10: v1(2745,3395) 2745,4055 U2.5@2890,4200
NetU2_6: U2.6 U3.4 | length 802.6
  Top Layer w10: U3.4 2533.46,3646.25 2533.46,3655.11 2620,3741.64 v1(2620,3845)
  Bottom Layer w10: v1(2620,3845) 2650,3875 2650,4015 2891.33,4256.33 2891.33,4291.33 U2.6@2895,4295
NetU2_7: U2.7 U4.3 U5.3 | length 1590.9
  Top Layer w10: U2.7@2900,4395 2975,4320 v1(2975,4165) ; v1(2975,3850) 2975,3669.99 U4.3@3015,3629.99 ; U4.3 U4.3@3015,3629.99 ; v1(3050,3850) 3050,3665 3021.81,3636.81 U4.3@3015.01,3630 ; v1(3050,4015) 3047.91,4017.09 3047.91,4097.91 v1(3100.78,4150.78)
  Bottom Layer w10: v1(2975,3850) v1(2975,4165) ; v1(3050,3850) v1(3050,4015) ; v1(3100.78,4150.78) 3100,4151.57 3100,4220 3185,4305 U5.3
NetU4_3: U4.6 U5.4 | length 777
  Top Layer w10: U4.6@2865,3630 v1(2865,3840) ; v1(2915,4025) 2915,4035.82 2925.78,4046.61 2925.78,4050.78 3075,4200 U5.4@3195,4200
  Bottom Layer w10: v1(2865,3840) 2865,3975 v1(2915,4025)
NetU4_11: U4.11 U5.2 | length 1733.3
  Top Layer w10: U4.11 2967.61,3392.39 2967.61,3327.39 v1@2975,3320
  Bottom Layer w10: v1(2975,3315) 3190,3315 3600,3725 ; U5.2 3203.99,4396.01 3228.99,4396.01 3600.51,4024.49 3600.51,3728.28
VREF: U2.1 U2A.6 | length 630.2
  Top Layer w10: v1(2535,4065) 2535,3979.89 2575.95,3938.94 2605.87,3938.94 U2A.6
  Bottom Layer w10: v1(2535,4065) 2535,4435 U2.1@2595,4495
pads on no net: U2A.1 U2A.3 U2A.7 U2A.8 U5.6

## Polygon pours and split planes (outlines as drawn)
GND on GND (split plane): 3879.9,2655.1 1020.1,2655.1 1020.1,4979.9 3879.9,4979.9
GND on GND (Plane2) (split plane): 3879.9,2655.1 1020.1,2655.1 1020.1,4979.9 3879.9,4979.9

## Silkscreen, mask and mechanical layers (free items; w line width, h text height)
Top Overlay:
  text "GND" at 1265,4660 h60 r90
  text "GND" at 1085,3610 h60 r90